# Altium PCB PCB1.PcbDoc
Units mm, origin at the board's own origin, x right, y up, seen from the top; angles counter-clockwise.
Board outline 55 x 52 mm, 6 copper layers (Top Layer, Int1 (GND), Int2 (Sign), Int3 (Sign), Int4 (PWR), Bottom Layer), stack 1.551 mm thick; 24 components, 14 nets, 48 pads, 20 vias.
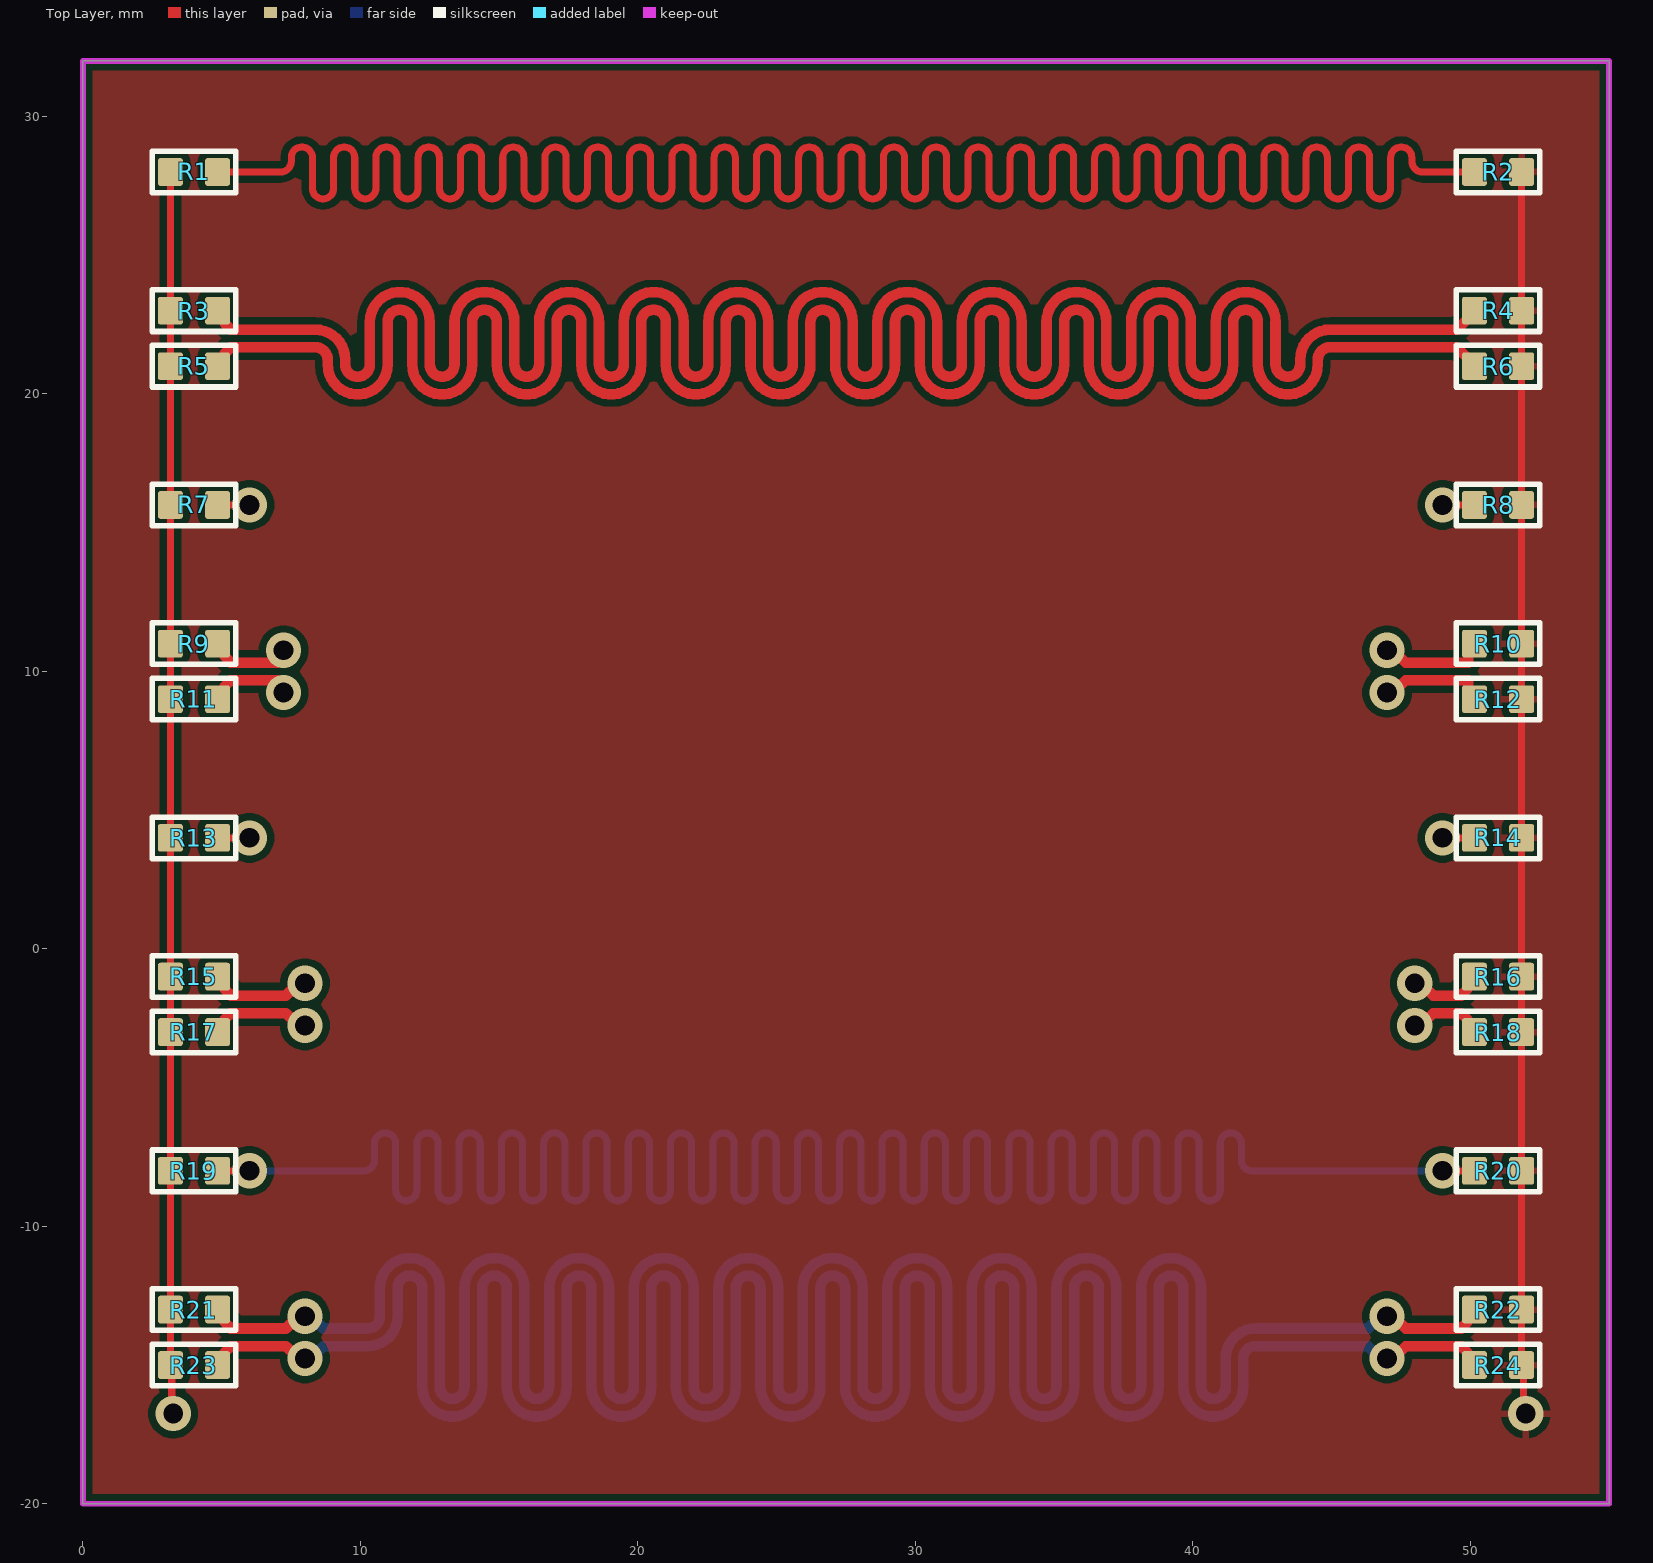
[diagram p0: Top Layer view]
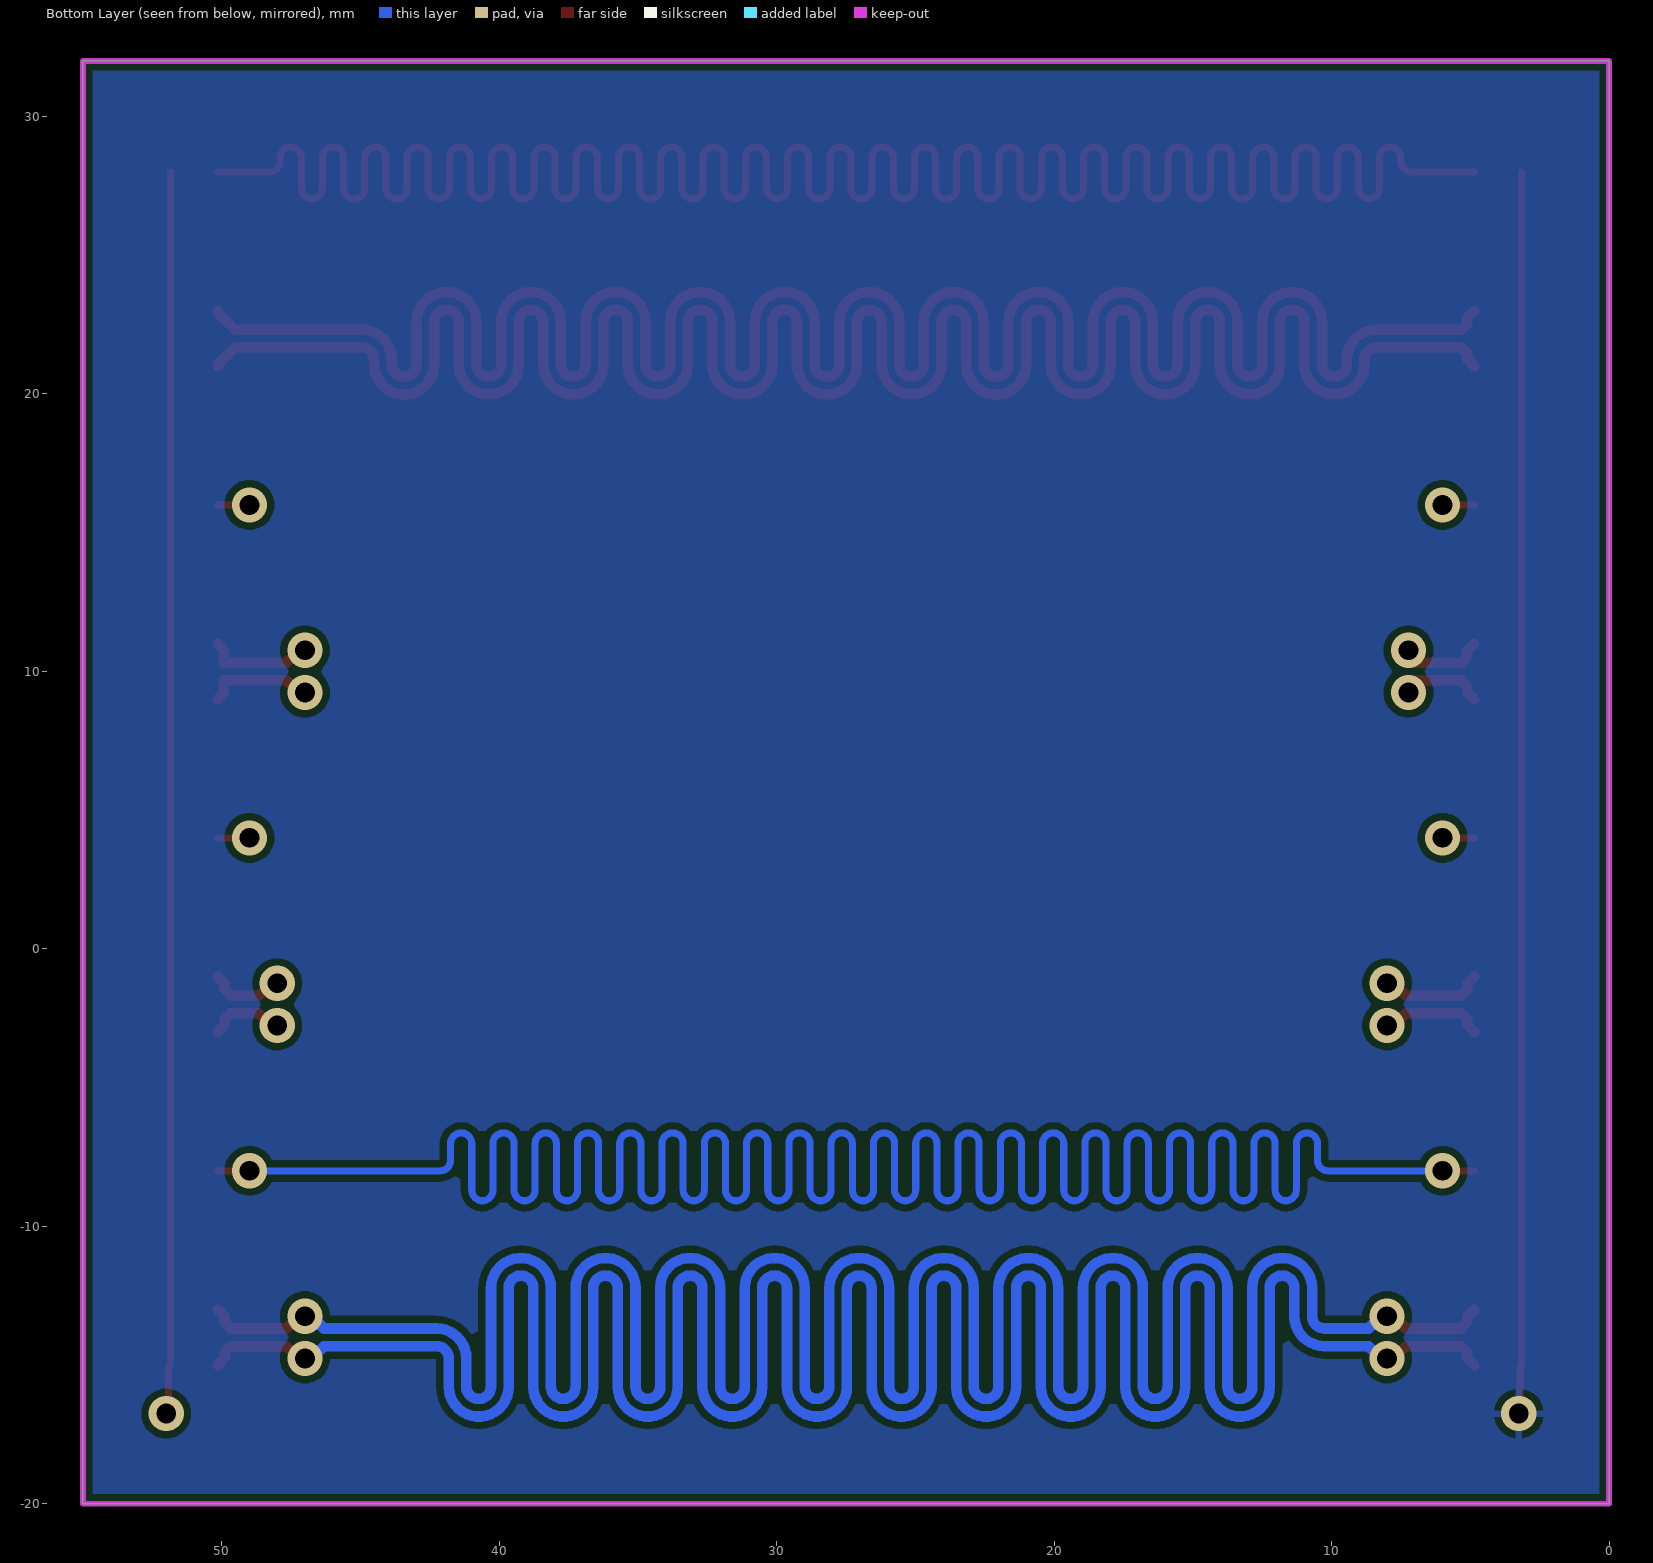
[diagram p1: Bottom Layer view, seen from below]
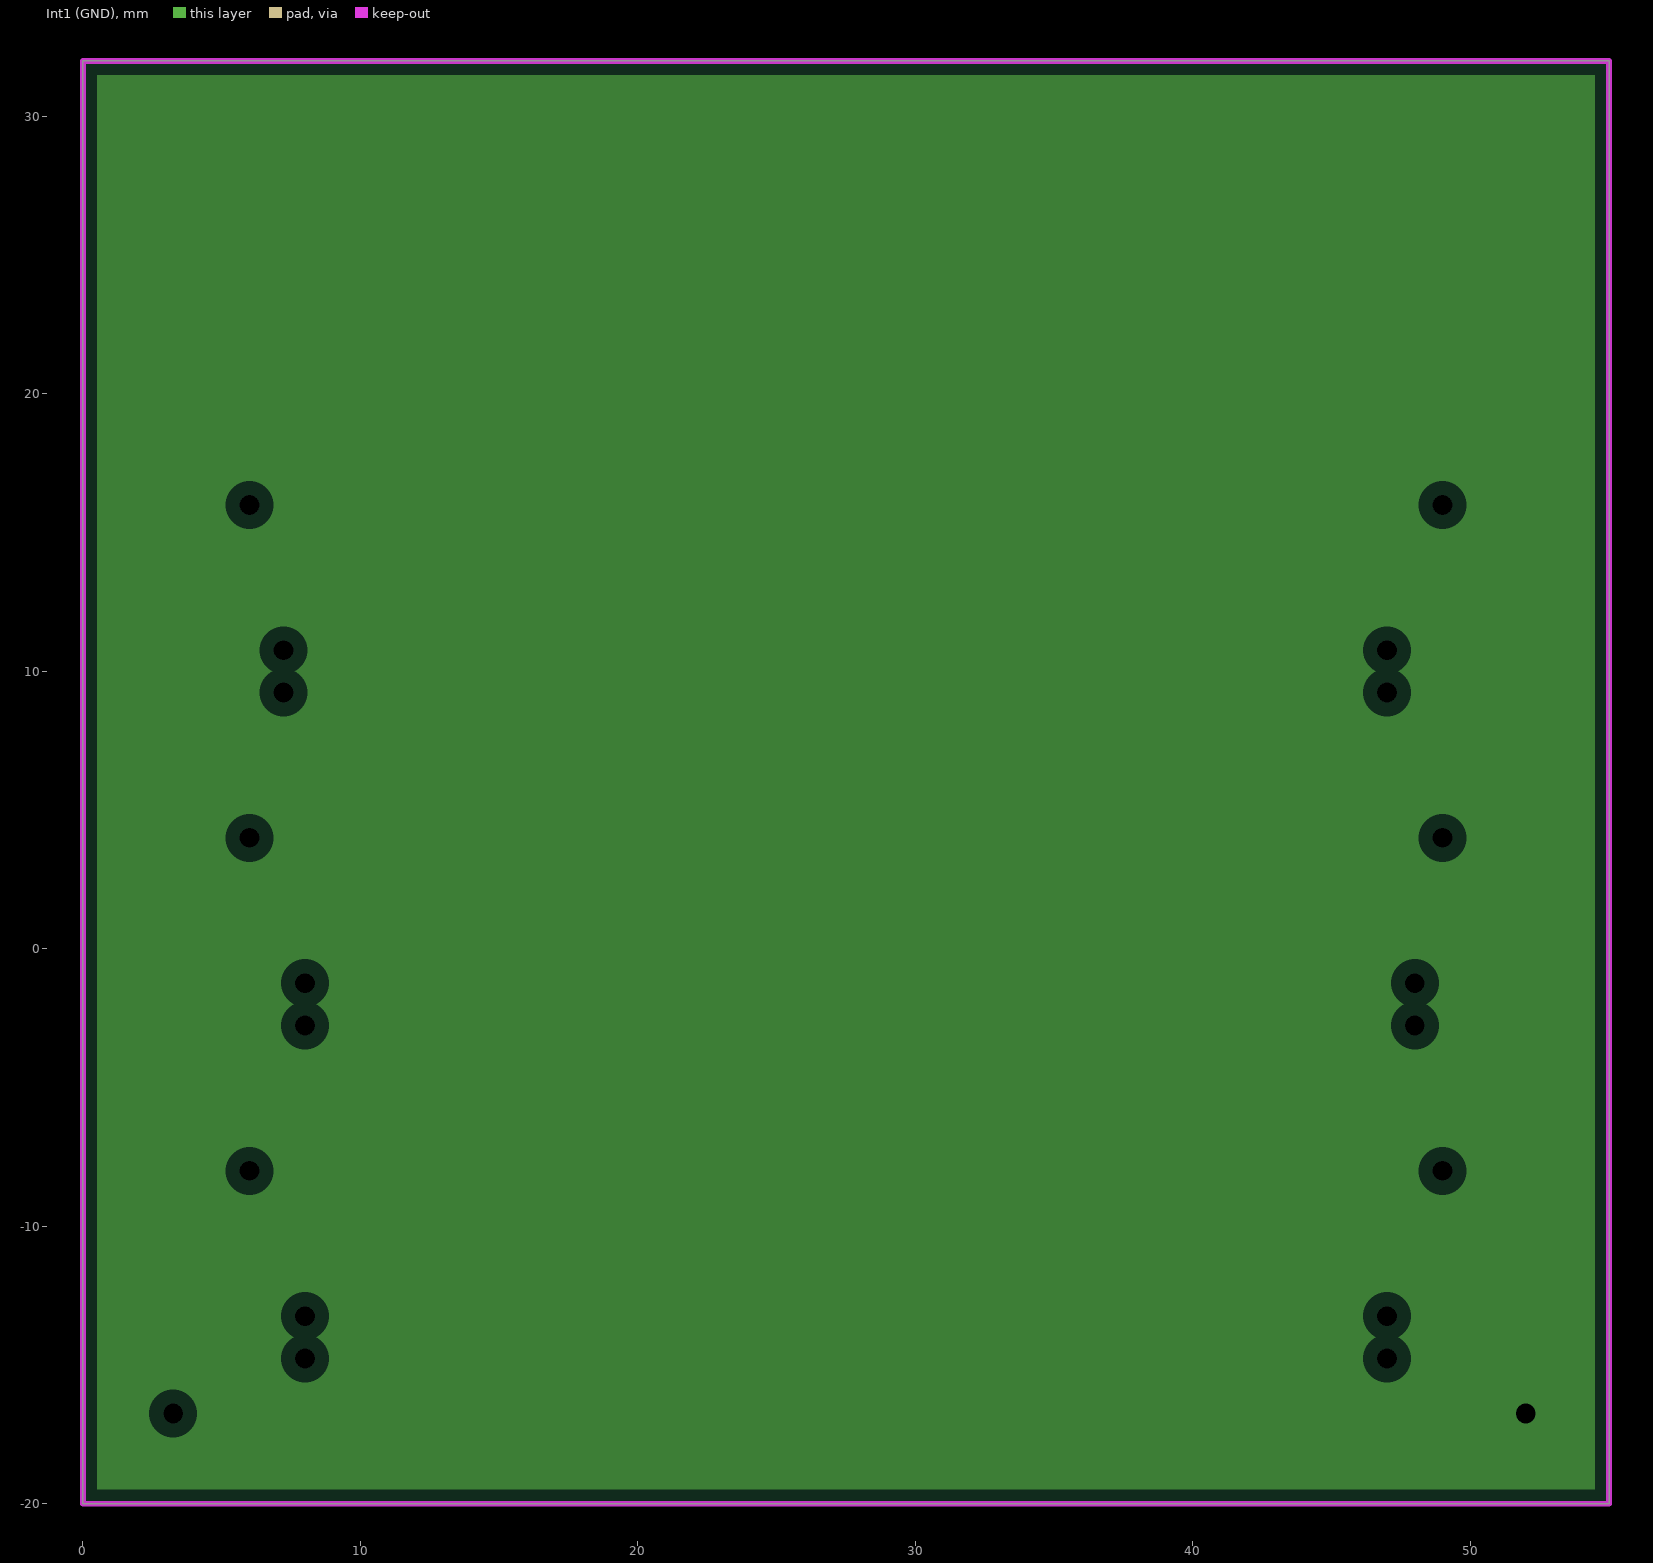
[diagram p2: Int1 (GND), clearances drawn from the general rule]
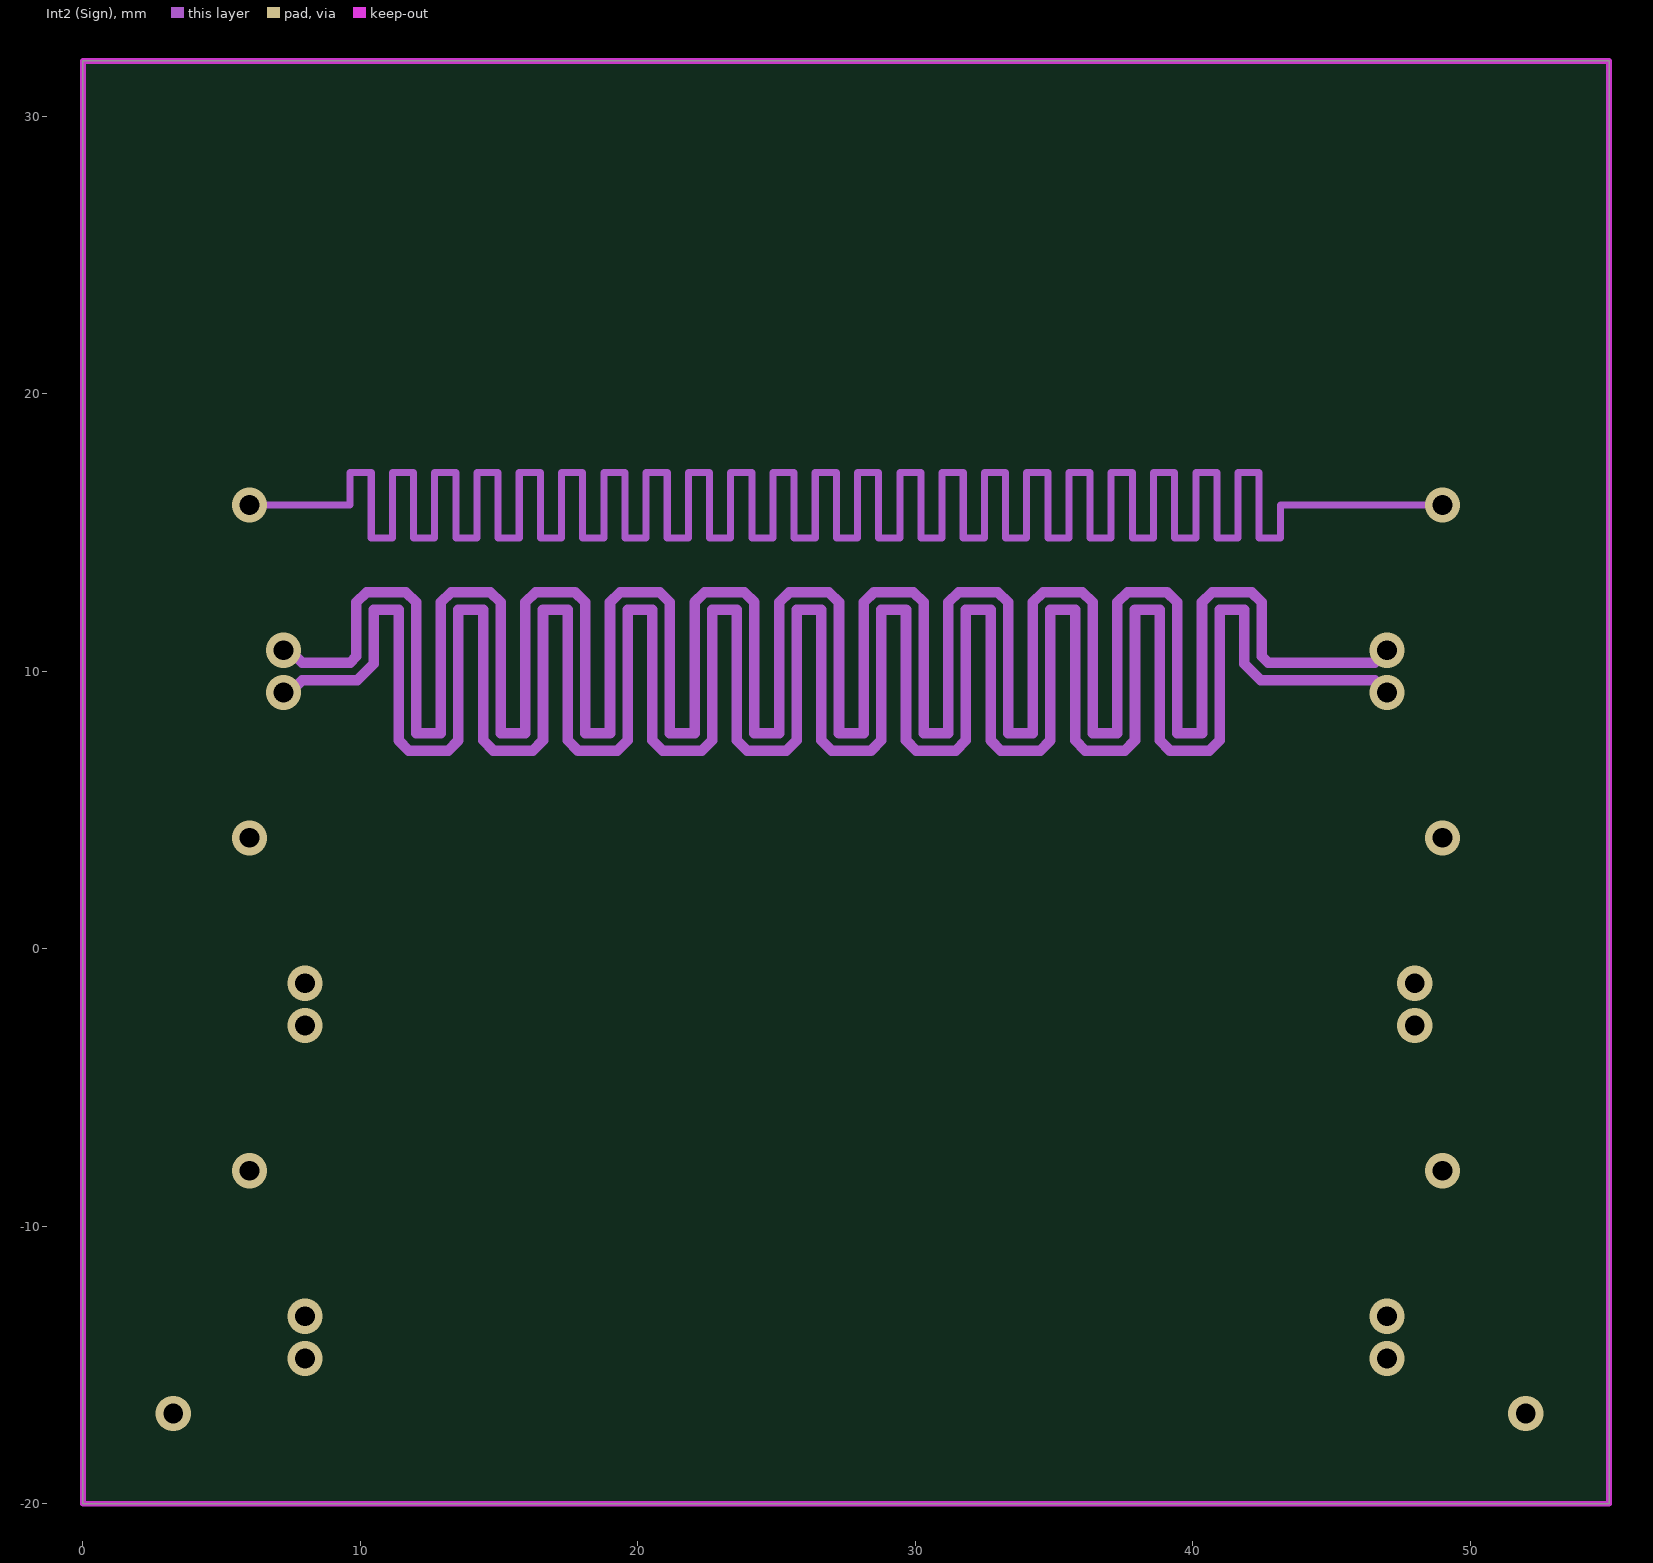
[diagram p3: Int2 (Sign)]
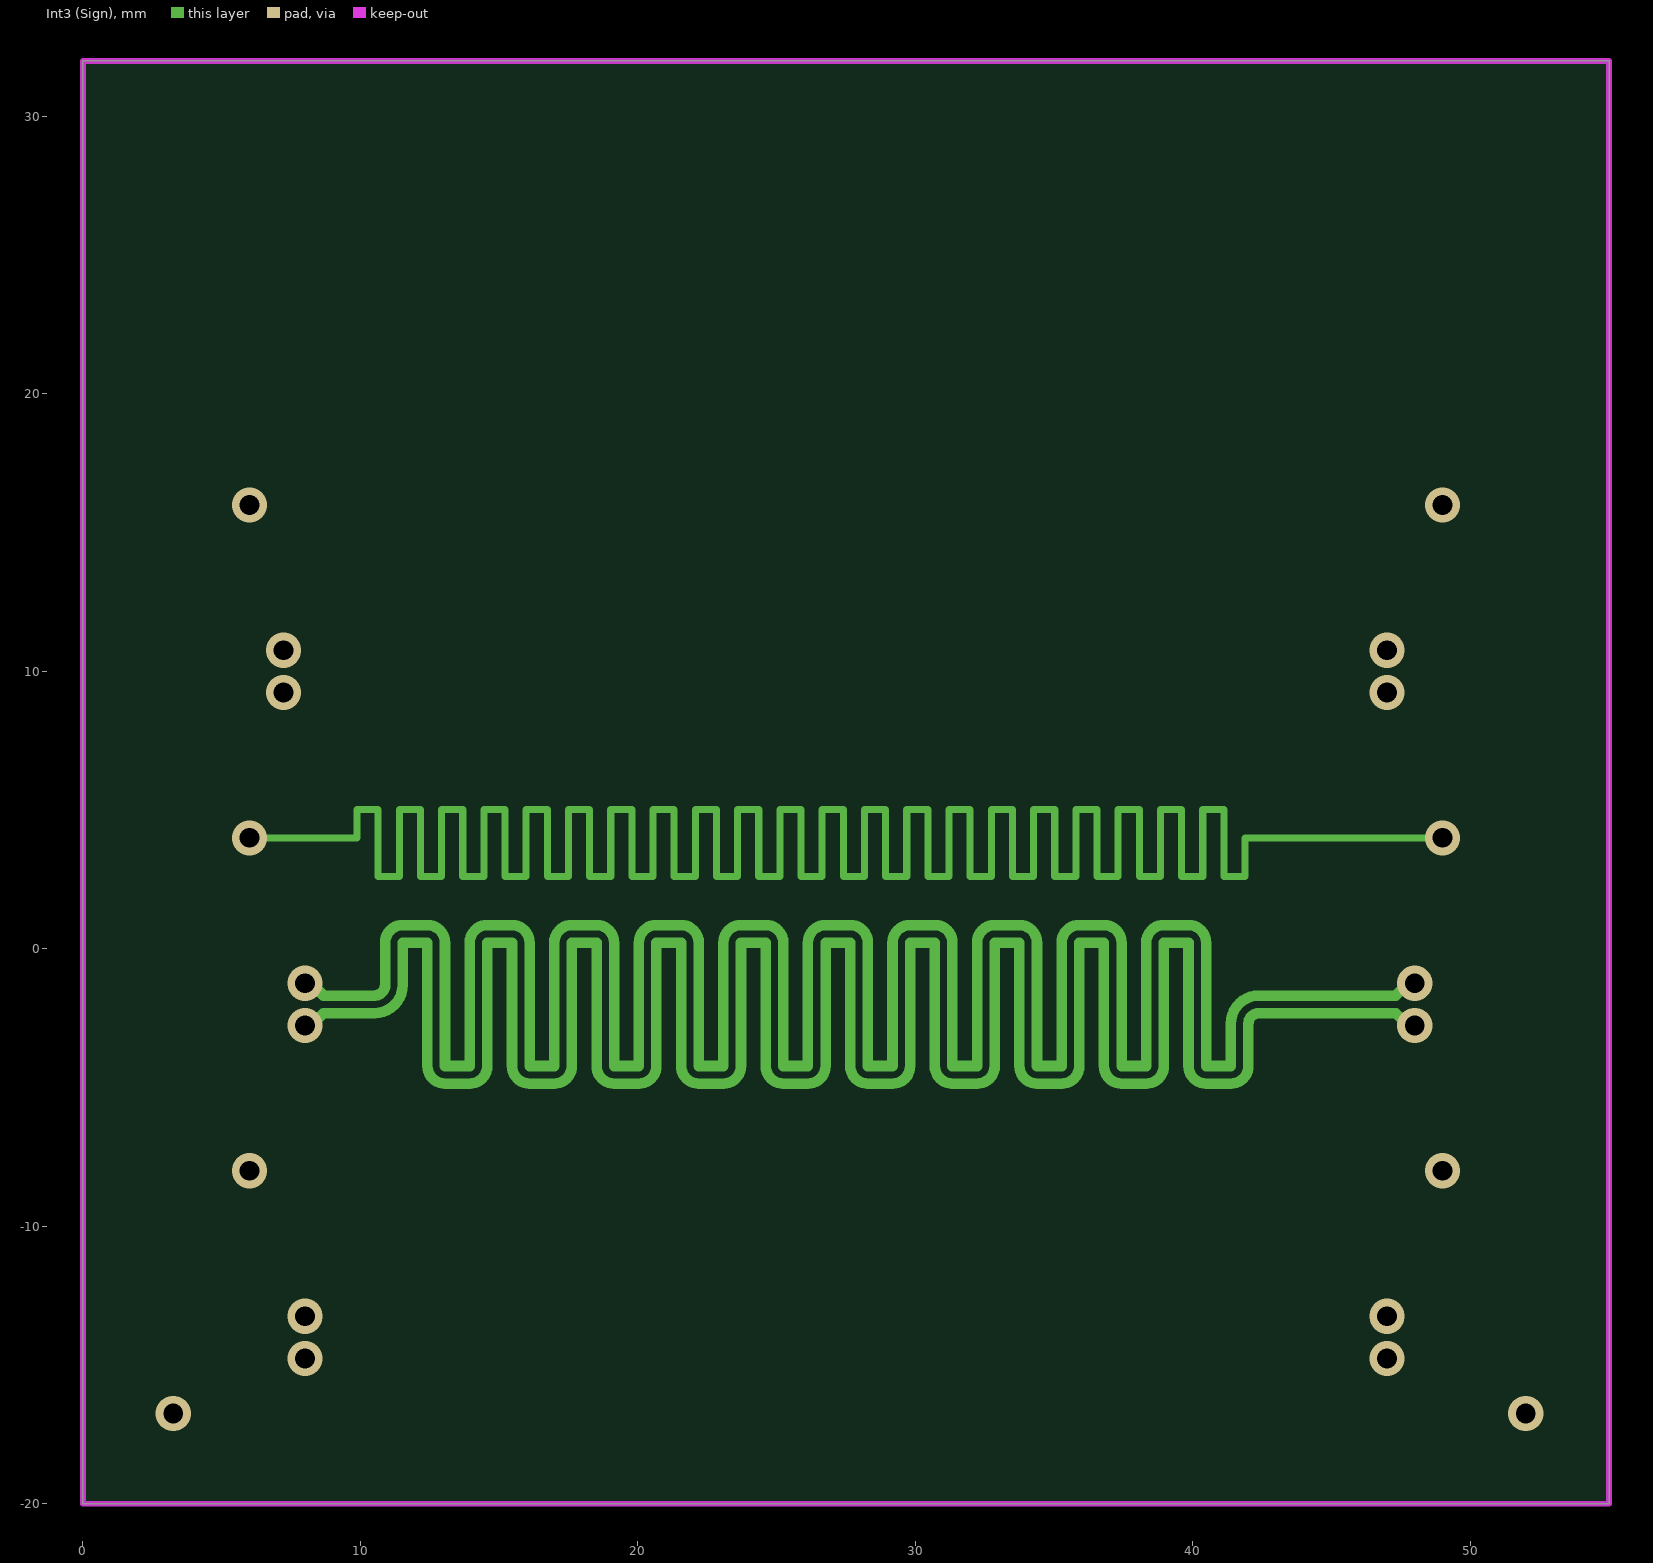
[diagram p4: Int3 (Sign)]
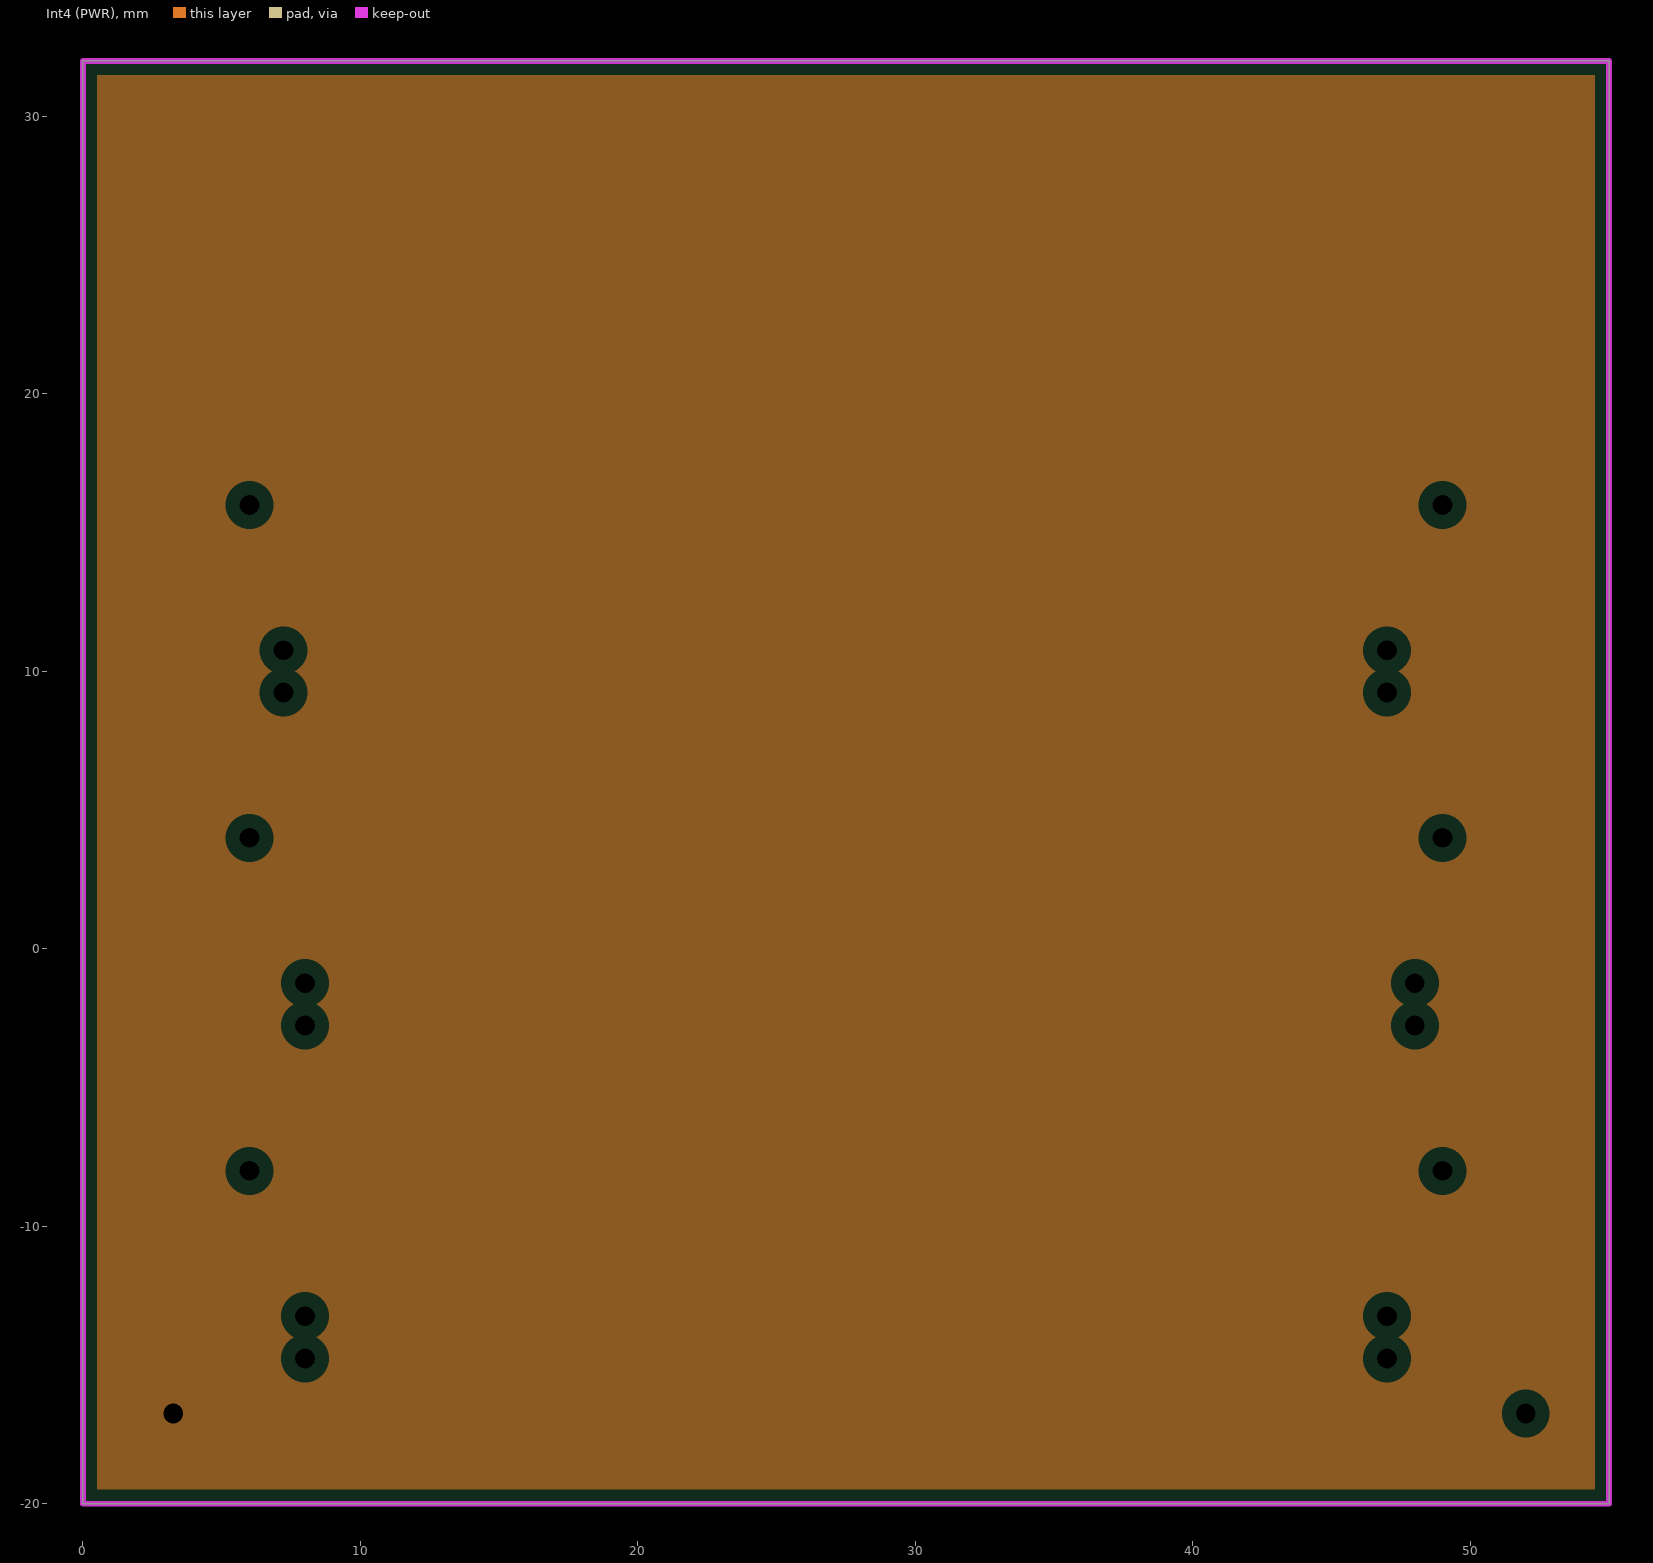
[diagram p5: Int4 (PWR), clearances drawn from the general rule]
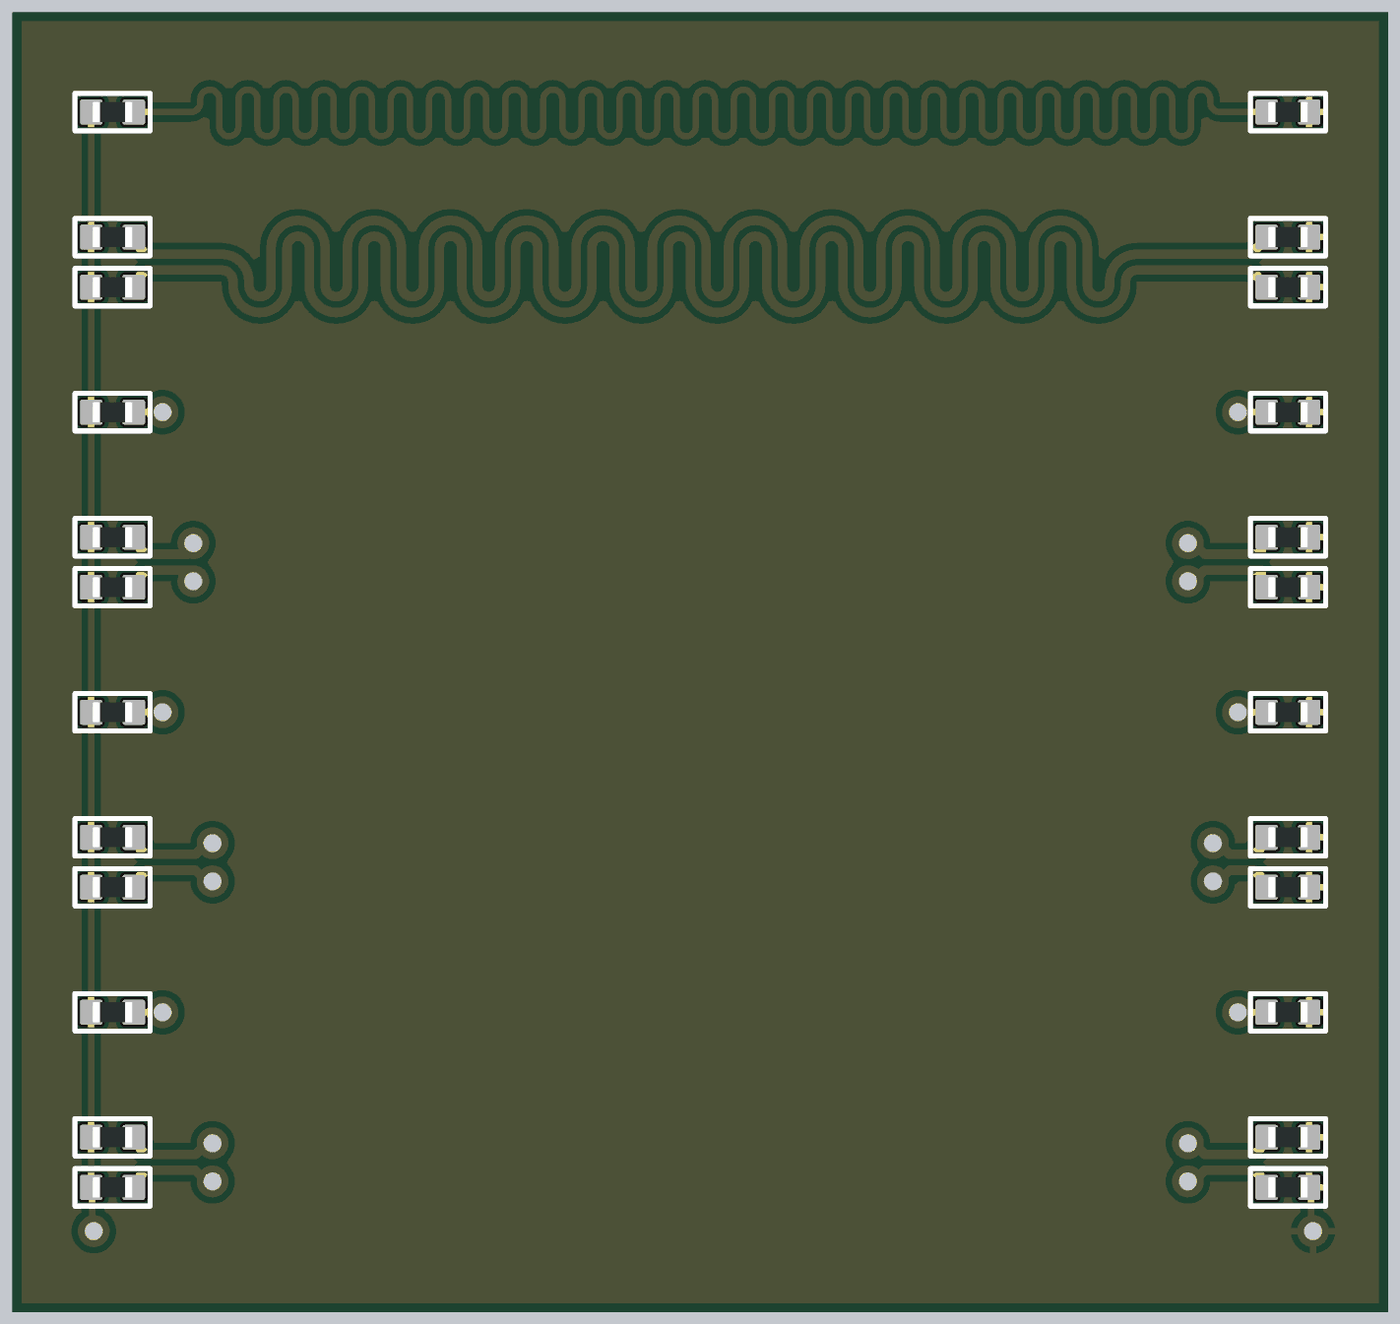
[diagram p6: 3D render of the assembled board from above, using the file's embedded part models]

## Layer stack, top to bottom
Top Solder: solder mask 0.0254, SM-001, Dk 4
Top Layer: signal copper 0.035
Dielectric 1: prepreg 0.0711, PP-006, Dk 4.1
Dielectric 2: prepreg 0.0711, PP-006, Dk 4.1
Int1 (GND): plane copper 0.035, net GND
Dielectric 3: core 0.4572, Core-035, Dk 4.7
Int2 (Sign): signal copper 0.035
Dielectric 4: prepreg 0.0711, PP-006, Dk 4.1
Dielectric 5: prepreg 0.0711, PP-006, Dk 4.1
Int3 (Sign): signal copper 0.035
Dielectric 6: core 0.4572, Core-035, Dk 4.7
Int4 (PWR): plane copper 0.035, net VCC
Dielectric 7: prepreg 0.0711, PP-006, Dk 4.1
Dielectric 8: prepreg 0.0711, PP-006, Dk 4.1
Bottom Layer: signal copper 0.035
Bottom Solder: solder mask 0.0254, SM-001, Dk 4

## Board outline
0,-20 0,32 55,32 55,-20

## Design rules (kind name [scope] priority, off if disabled: settings)
Clearance [All] p1: gap=0.254 ignorepadtopadclearanceinfootprint=FALSE
DiffPairsRouting [All] p1: maxlimit=0.254 minlimit=0.254 mostfreqgap=0.254 toplayer_minwidth=0.381 toplayer_maxwidth=0.381 toplayer_prefwidth=0.381 midlayer1_minwidth=0.381 midlayer1_maxwidth=0.381 midlayer1_prefwidth=0.381 midlayer2_minwidth=0.381 midlayer2_maxwidth=0.381 midlayer2_prefwidth=0.381 bottomlayer_minwidth=0.381 bottomlayer_maxwidth=0.381 bottomlayer_prefwidth=0.381 maxuncoupledlength=12.7
PlaneClearance [All] p1: clearance=0.508
PlaneConnect [All] p1: planeconnectstyle=Relief reliefexpansion=0.508 reliefentries=4 reliefconductorwidth=0.254 reliefairgap=0.254
PolygonConnect [All] p1: connectstyle=Relief reliefconductorwidth=0.254 reliefentries=4 polygonreliefangle="90 Angle" airgapwidth=0.254
RoutingVias [All] p1: holewidth=0.711 width=1.27 viastyle="Through Hole" minholewidth=0.711 minwidth=1.27 maxholewidth=0.711 maxwidth=1.27
SolderMaskExpansion [All] p1: expansion=0.102 istentingtop=FALSE
Width [All] p1: maxlimit=0.254 minlimit=0.254 preferedwidth=0.254
27 further rules are at their usual default settings.

## Classes and differential pairs
differential pair class 90R: Bottom_Layer_Diff Inner_Layer2_Diff Inner_Layer3_Diff Top_Layer_Diff
differential pair Top_Layer_Diff: +Top_Layer_Diff_P -Top_Layer_Diff_N
differential pair Inner_Layer3_Diff: +Inner_Layer3_Diff_P -Inner_Layer3_Diff_N
differential pair Inner_Layer2_Diff: +Inner_Layer2_Diff_P -Inner_Layer2_Diff_N
differential pair Bottom_Layer_Diff: +Bottom_Layer_Diff_P -Bottom_Layer_Diff_N

## Components (designator, comment, footprint, x,y, rotation, side; value= is the part's Value field where it differs from the comment)
R1 "RES-0603" RES-0603 4,28 r0 top value=10K
R2 "RES-0603" RES-0603 51,28 r0 top value=10K
R3 "RES-0603" RES-0603 4,23 r0 top value=10K
R4 "RES-0603" RES-0603 51,23 r0 top value=10K
R5 "RES-0603" RES-0603 4,21 r0 top value=10K
R6 "RES-0603" RES-0603 51,21 r0 top value=10K
R7 "RES-0603" RES-0603 4,16 r0 top value=10K
R8 "RES-0603" RES-0603 51,16 r0 top value=10K
R9 "RES-0603" RES-0603 4,11 r0 top value=10K
R10 "RES-0603" RES-0603 51,11 r0 top value=10K
R11 "RES-0603" RES-0603 4,9 r0 top value=10K
R12 "RES-0603" RES-0603 51,9 r0 top value=10K
R13 "RES-0603" RES-0603 4,4 r0 top value=10K
R14 "RES-0603" RES-0603 51,4 r0 top value=10K
R15 "RES-0603" RES-0603 4,-1 r0 top value=10K
R16 "RES-0603" RES-0603 51,-1 r0 top value=10K
R17 "RES-0603" RES-0603 4,-3 r0 top value=10K
R18 "RES-0603" RES-0603 51,-3 r0 top value=10K
R19 "RES-0603" RES-0603 4,-8 r0 top value=10K
R20 "RES-0603" RES-0603 51,-8 r0 top value=10K
R21 "RES-0603" RES-0603 4,-13 r0 top value=10K
R22 "RES-0603" RES-0603 51,-13 r0 top value=10K
R23 "RES-0603" RES-0603 4,-15 r0 top value=10K
R24 "RES-0603" RES-0603 51,-15 r0 top value=10K

## Footprints (in the part's own frame and the unit in brackets; to place one, negate y for a bottom-side part, rotate by r counter-clockwise, add the part's x,y. Pads: shape width x height; smd on the part's side, far side on the other; paste and mask are expansions set on the pad)
RES-0603 [mm]
  rrect20% 0.9x1 smd: 1(-0.85,0) 2(0.85,0)
  silkscreen extent -1.5,-0.75 1.5,0.75, body extent -0.8,-0.4 0.8,0.4, height 0.45

## Part data
R1 R2 R3 R4 R5 R6 R7 R8 R9 R10 R11 R12 R13 R14 R15 R16 R17 R18 R19 R20 R21 R22 R23 R24: library part Res-XR-0603, "General x Ohm 0603"

## Via types
v1: diameter 1.27, hole 0.711, Top Layer to Bottom Layer, tented both sides, 20 vias

## Nets (pads, with @x,y where several pads share a name; then routed paths per layer and width w, separated by ;. In a path a pad name is that pad's centre, name@x,y a point inside that pad or via, vN(x,y) a via of type N, cw(c..) or ccw(c..) an arc to the next point about the centre after c; other vN are vias at no path point)
Bottom_Layer_Diff_N: R23.2 R24.1 | length 134.7
  Top Layer w0.381: R23.2 5.11,-14.74 5.11,-14.541 5.333,-14.317 5.956,-14.317 7.315,-14.317 7.759,-14.762 v1(8,-14.762) ; v1(47,-14.762) 47.223,-14.762 47.668,-14.317 48.853,-14.317 49.667,-14.317 49.891,-14.541 49.891,-14.74 R24.1
  Bottom Layer w0.381: v1(8,-14.762) 8.223,-14.762 8.668,-14.317 9.75,-14.317 10.258,-14.317 ccw(c10.258,-13.238) 11.338,-13.238 11.338,-12.222 cw(c11.782,-12.222) 12.227,-12.222 12.227,-15.778 ccw(c13.306,-15.778) 14.386,-15.778 14.386,-12.222 cw(c14.83,-12.222) 15.275,-12.222 15.275,-15.778 ccw(c16.354,-15.778) 17.434,-15.778 17.434,-12.222 cw(c17.878,-12.222) 18.323,-12.222 18.323,-15.778 ccw(c19.402,-15.778) 20.482,-15.778 20.482,-12.222 cw(c20.926,-12.222) 21.371,-12.222 21.371,-15.778 ccw(c22.45,-15.778) 23.53,-15.778 23.53,-12.222 cw(c23.974,-12.222) 24.419,-12.222 24.419,-15.778 ccw(c25.498,-15.778) 26.578,-15.778 26.578,-12.222 cw(c27.022,-12.222) 27.467,-12.222 27.467,-15.778 ccw(c28.546,-15.778) 29.626,-15.778 29.626,-12.222 cw(c30.07,-12.222) 30.515,-12.222 30.515,-15.778 ccw(c31.594,-15.778) 32.674,-15.778 32.674,-12.222 cw(c33.118,-12.222) 33.563,-12.222 33.563,-15.778 ccw(c34.642,-15.778) 35.722,-15.778 35.722,-12.222 cw(c36.166,-12.222) 36.611,-12.222 36.611,-15.778 ccw(c37.69,-15.778) 38.77,-15.778 38.77,-12.222 cw(c39.214,-12.222) 39.659,-12.222 39.659,-15.778 ccw(c40.738,-15.778) 41.818,-15.778 41.818,-14.762 cw(c42.262,-14.762) 42.262,-14.317 45,-14.317 46.315,-14.317 46.759,-14.762 v1(47,-14.762)
Bottom_Layer_Diff_P: R21.2 R22.1 | length 134.7
  Top Layer w0.381: R21.2 5.11,-13.26 5.11,-13.459 5.333,-13.682 5.693,-13.682 7.315,-13.682 7.759,-13.238 v1(8,-13.238) ; v1(47,-13.238) 47.223,-13.238 47.668,-13.682 49.116,-13.682 49.667,-13.682 49.891,-13.459 49.891,-13.26 R22.1
  Bottom Layer w0.381: v1(8,-13.238) 8.223,-13.238 8.668,-13.682 9.75,-13.682 10.258,-13.682 ccw(c10.258,-13.238) 10.703,-13.238 10.703,-12.222 cw(c11.782,-12.222) 12.862,-12.222 12.862,-15.778 ccw(c13.306,-15.778) 13.751,-15.778 13.751,-12.222 cw(c14.83,-12.222) 15.91,-12.222 15.91,-15.778 ccw(c16.354,-15.778) 16.799,-15.778 16.799,-12.222 cw(c17.878,-12.222) 18.958,-12.222 18.958,-15.778 ccw(c19.402,-15.778) 19.847,-15.778 19.847,-12.222 cw(c20.926,-12.222) 22.006,-12.222 22.006,-15.778 ccw(c22.45,-15.778) 22.895,-15.778 22.895,-12.222 cw(c23.974,-12.222) 25.054,-12.222 25.054,-15.778 ccw(c25.498,-15.778) 25.943,-15.778 25.943,-12.222 cw(c27.022,-12.222) 28.102,-12.222 28.102,-15.778 ccw(c28.546,-15.778) 28.991,-15.778 28.991,-12.222 cw(c30.07,-12.222) 31.15,-12.222 31.15,-15.778 ccw(c31.594,-15.778) 32.039,-15.778 32.039,-12.222 cw(c33.118,-12.222) 34.198,-12.222 34.198,-15.778 ccw(c34.642,-15.778) 35.087,-15.778 35.087,-12.222 cw(c36.166,-12.222) 37.246,-12.222 37.246,-15.778 ccw(c37.69,-15.778) 38.135,-15.778 38.135,-12.222 cw(c39.214,-12.222) 40.294,-12.222 40.294,-15.778 ccw(c40.738,-15.778) 41.183,-15.778 41.183,-14.762 cw(c42.262,-14.762) 42.262,-13.682 45,-13.682 46.315,-13.682 46.759,-13.238 v1(47,-13.238)
Bottom_Layer_Single: R19.2 R20.1 | length 132.1
  Top Layer w0.254: R19.2 v1(6,-8) ; v1(49,-8) R20.1
  Bottom Layer w0.254: v1(6,-8) 10,-8 10.127,-8 ccw(c10.127,-7.619) 10.508,-7.619 10.508,-7.015 cw(c10.889,-7.015) 11.27,-7.015 11.27,-8.698 ccw(c11.651,-8.698) 12.032,-8.698 12.032,-7.015 cw(c12.413,-7.015) 12.794,-7.015 12.794,-8.698 ccw(c13.175,-8.698) 13.556,-8.698 13.556,-7.015 cw(c13.937,-7.015) 14.318,-7.015 14.318,-8.698 ccw(c14.699,-8.698) 15.08,-8.698 15.08,-7.015 cw(c15.461,-7.015) 15.842,-7.015 15.842,-8.698 ccw(c16.223,-8.698) 16.604,-8.698 16.604,-7.015 cw(c16.985,-7.015) 17.366,-7.015 17.366,-8.698 ccw(c17.747,-8.698) 18.128,-8.698 18.128,-7.015 cw(c18.509,-7.015) 18.89,-7.015 18.89,-8.698 ccw(c19.271,-8.698) 19.652,-8.698 19.652,-7.015 cw(c20.033,-7.015) 20.414,-7.015 20.414,-8.698 ccw(c20.795,-8.698) 21.176,-8.698 21.176,-7.015 cw(c21.557,-7.015) 21.938,-7.015 21.938,-8.698 ccw(c22.319,-8.698) 22.7,-8.698 22.7,-7.015 cw(c23.081,-7.015) 23.462,-7.015 23.462,-8.698 ccw(c23.843,-8.698) 24.224,-8.698 24.224,-7.015 cw(c24.605,-7.015) 24.986,-7.015 24.986,-8.698 ccw(c25.367,-8.698) 25.748,-8.698 25.748,-7.015 cw(c26.129,-7.015) 26.51,-7.015 26.51,-8.698 ccw(c26.891,-8.698) 27.272,-8.698 27.272,-7.015 cw(c27.653,-7.015) 28.034,-7.015 28.034,-8.698 ccw(c28.415,-8.698) 28.796,-8.698 28.796,-7.015 cw(c29.177,-7.015) 29.558,-7.015 29.558,-8.698 ccw(c29.939,-8.698) 30.32,-8.698 30.32,-7.015 cw(c30.701,-7.015) 31.082,-7.015 31.082,-8.698 ccw(c31.463,-8.698) 31.844,-8.698 31.844,-7.015 cw(c32.225,-7.015) 32.606,-7.015 32.606,-8.698 ccw(c32.987,-8.698) 33.368,-8.698 33.368,-7.015 cw(c33.749,-7.015) 34.13,-7.015 34.13,-8.698 ccw(c34.511,-8.698) 34.892,-8.698 34.892,-7.015 cw(c35.273,-7.015) 35.654,-7.015 35.654,-8.698 ccw(c36.035,-8.698) 36.416,-8.698 36.416,-7.015 cw(c36.797,-7.015) 37.178,-7.015 37.178,-8.698 ccw(c37.559,-8.698) 37.94,-8.698 37.94,-7.015 cw(c38.321,-7.015) 38.702,-7.015 38.702,-8.698 ccw(c39.083,-8.698) 39.464,-8.698 39.464,-7.015 cw(c39.845,-7.015) 40.226,-7.015 40.226,-8.698 ccw(c40.607,-8.698) 40.988,-8.698 40.988,-7.015 cw(c41.369,-7.015) 41.75,-7.015 41.75,-7.619 ccw(c42.131,-7.619) 42.131,-8 43.25,-8 v1(49,-8)
GND: R2.2 R4.2 R6.2 R8.2 R10.2 R12.2 R14.2 R16.2 R18.2 R20.2 R22.2 R24.2 | length 44.8
  Top Layer w0.254: R2.2 R4.2 R6.2 R8.2 R10.2 R12.2 R14.2 R16.2 R18.2 R20.2 R22.2 R24.2 51.925,-15.075 51.925,-16.675 v1(52,-16.75)
Inner_Layer2_Diff_N: R11.2 R12.1 | length 148.7
  Top Layer w0.381: R11.2 5.11,9.26 5.11,9.459 5.333,9.683 7,9.683 7.229,9.453 v1(7.229,9.238) ; v1(47,9.238) 47.223,9.238 47.668,9.683 49.927,9.683 49.927,9.223 R12.1
  Int2 (Sign) w0.381: v1(7.229,9.238) 7.452,9.238 7.897,9.683 9.25,9.683 9.89,9.683 10.485,10.278 10.485,12.223 11.374,12.223 11.374,7.514 11.746,7.143 13.161,7.143 13.533,7.514 13.533,12.223 14.422,12.223 14.422,7.514 14.794,7.143 16.209,7.143 16.581,7.514 16.581,12.223 17.47,12.223 17.47,7.514 17.842,7.143 19.257,7.143 19.629,7.514 19.629,12.223 20.518,12.223 20.518,7.514 20.89,7.143 22.305,7.143 22.677,7.514 22.677,12.223 23.566,12.223 23.566,7.514 23.938,7.143 25.353,7.143 25.725,7.514 25.725,12.223 26.614,12.223 26.614,7.514 26.986,7.143 28.401,7.143 28.773,7.514 28.773,12.223 29.662,12.223 29.662,7.514 30.034,7.143 31.449,7.143 31.821,7.514 31.821,12.223 32.71,12.223 32.71,7.514 33.082,7.143 34.497,7.143 34.869,7.514 34.869,12.223 35.758,12.223 35.758,7.514 36.13,7.143 37.545,7.143 37.917,7.514 37.917,12.223 38.806,12.223 38.806,7.514 39.178,7.143 40.593,7.143 40.965,7.514 40.965,12.223 41.854,12.223 41.854,10.278 42.449,9.683 44.5,9.683 46.556,9.683 v1(47,9.238)
Inner_Layer2_Diff_P: R9.2 R10.1 | length 148.7
  Top Layer w0.381: R9.2 5.11,10.74 5.11,10.541 5.333,10.318 7,10.318 7.229,10.547 v1(7.229,10.762) ; v1(47,10.762) 47.223,10.762 47.668,10.318 49.927,10.318 49.927,10.777 R10.1
  Int2 (Sign) w0.381: v1(7.229,10.762) 7.452,10.762 7.897,10.318 9.25,10.318 9.627,10.318 9.85,10.541 9.85,12.486 10.222,12.858 11.637,12.858 12.009,12.486 12.009,7.778 12.898,7.778 12.898,12.486 13.27,12.858 14.685,12.858 15.057,12.486 15.057,7.778 15.946,7.778 15.946,12.486 16.318,12.858 17.733,12.858 18.105,12.486 18.105,7.778 18.994,7.778 18.994,12.486 19.366,12.858 20.781,12.858 21.153,12.486 21.153,7.778 22.042,7.778 22.042,12.486 22.414,12.858 23.829,12.858 24.201,12.486 24.201,7.778 25.09,7.778 25.09,12.486 25.462,12.858 26.877,12.858 27.249,12.486 27.249,7.778 28.138,7.778 28.138,12.486 28.51,12.858 29.925,12.858 30.297,12.486 30.297,7.778 31.186,7.778 31.186,12.486 31.558,12.858 32.973,12.858 33.345,12.486 33.345,7.778 34.234,7.778 34.234,12.486 34.606,12.858 36.021,12.858 36.393,12.486 36.393,7.778 37.282,7.778 37.282,12.486 37.654,12.858 39.069,12.858 39.441,12.486 39.441,7.778 40.33,7.778 40.33,12.486 40.702,12.858 42.117,12.858 42.489,12.486 42.489,10.541 42.712,10.318 44.5,10.318 46.556,10.318 v1(47,10.762)
Inner_Layer2_Single: R7.2 R8.1 | length 149.7
  Top Layer w0.254: R7.2 v1(6,16) ; v1(49,16) R8.1
  Int2 (Sign) w0.254: v1(6,16) 9.5,16 9.627,16 9.627,17.172 10.389,17.172 10.389,14.8 11.151,14.8 11.151,17.172 11.913,17.172 11.913,14.8 12.675,14.8 12.675,17.172 13.437,17.172 13.437,14.8 14.199,14.8 14.199,17.172 14.961,17.172 14.961,14.8 15.723,14.8 15.723,17.172 16.485,17.172 16.485,14.8 17.247,14.8 17.247,17.172 18.009,17.172 18.009,14.8 18.771,14.8 18.771,17.172 19.533,17.172 19.533,14.8 20.295,14.8 20.295,17.172 21.057,17.172 21.057,14.8 21.819,14.8 21.819,17.172 22.581,17.172 22.581,14.8 23.343,14.8 23.343,17.172 24.105,17.172 24.105,14.8 24.867,14.8 24.867,17.172 25.629,17.172 25.629,14.8 26.391,14.8 26.391,17.172 27.153,17.172 27.153,14.8 27.915,14.8 27.915,17.172 28.677,17.172 28.677,14.8 29.439,14.8 29.439,17.172 30.201,17.172 30.201,14.8 30.963,14.8 30.963,17.172 31.725,17.172 31.725,14.8 32.487,14.8 32.487,17.172 33.249,17.172 33.249,14.8 34.011,14.8 34.011,17.172 34.773,17.172 34.773,14.8 35.535,14.8 35.535,17.172 36.297,17.172 36.297,14.8 37.059,14.8 37.059,17.172 37.821,17.172 37.821,14.8 38.583,14.8 38.583,17.172 39.345,17.172 39.345,14.8 40.107,14.8 40.107,17.172 40.869,17.172 40.869,14.8 41.631,14.8 41.631,17.172 42.393,17.172 42.393,14.8 43.155,14.8 43.155,16 43.75,16 v1(49,16)
Inner_Layer3_Diff_N: R17.2 R18.1 | length 142.4
  Top Layer w0.381: R17.2 5.11,-2.74 5.11,-2.541 5.333,-2.318 5.956,-2.318 7.315,-2.317 7.759,-2.762 v1(8,-2.762) ; v1(48,-2.762) 48.223,-2.762 48.668,-2.317 49.044,-2.317 49.667,-2.318 49.891,-2.541 49.891,-2.74 R18.1
  Int3 (Sign) w0.381: v1(8,-2.762) 8.223,-2.762 8.668,-2.317 10,-2.317 10.508,-2.317 ccw(c10.508,-1.301) 11.524,-1.301 11.524,0.223 12.413,0.223 12.413,-4.222 ccw(c13.048,-4.222) 13.048,-4.857 13.937,-4.857 ccw(c13.937,-4.222) 14.572,-4.222 14.572,0.223 15.461,0.223 15.461,-4.222 ccw(c16.096,-4.222) 16.096,-4.857 16.985,-4.857 ccw(c16.985,-4.222) 17.62,-4.222 17.62,0.223 18.509,0.223 18.509,-4.222 ccw(c19.144,-4.222) 19.144,-4.857 20.033,-4.857 ccw(c20.033,-4.222) 20.668,-4.222 20.668,0.223 21.557,0.223 21.557,-4.222 ccw(c22.192,-4.222) 22.192,-4.857 23.081,-4.857 ccw(c23.081,-4.222) 23.716,-4.222 23.716,0.223 24.605,0.223 24.605,-4.222 ccw(c25.24,-4.222) 25.24,-4.857 26.129,-4.857 ccw(c26.129,-4.222) 26.764,-4.222 26.764,0.223 27.653,0.223 27.653,-4.222 ccw(c28.288,-4.222) 28.288,-4.857 29.177,-4.857 ccw(c29.177,-4.222) 29.812,-4.222 29.812,0.223 30.701,0.223 30.701,-4.222 ccw(c31.336,-4.222) 31.336,-4.857 32.225,-4.857 ccw(c32.225,-4.222) 32.86,-4.222 32.86,0.223 33.749,0.223 33.749,-4.222 ccw(c34.384,-4.222) 34.384,-4.857 35.273,-4.857 ccw(c35.273,-4.222) 35.908,-4.222 35.908,0.223 36.797,0.223 36.797,-4.222 ccw(c37.432,-4.222) 37.432,-4.857 38.321,-4.857 ccw(c38.321,-4.222) 38.956,-4.222 38.956,0.223 39.845,0.223 39.845,-4.222 ccw(c40.48,-4.222) 40.48,-4.857 41.369,-4.857 ccw(c41.369,-4.222) 42.004,-4.222 42.004,-2.698 cw(c42.385,-2.698) 42.385,-2.317 44.75,-2.317 47.315,-2.317 47.759,-2.762 v1(48,-2.762)
Inner_Layer3_Diff_P: R15.2 R16.1 | length 142.4
  Top Layer w0.381: R15.2 5.11,-1.26 5.11,-1.459 5.333,-1.683 5.693,-1.683 7.315,-1.682 7.759,-1.238 v1(8,-1.238) ; v1(48,-1.238) 48.223,-1.238 48.668,-1.682 49.307,-1.682 49.667,-1.683 49.891,-1.459 49.891,-1.26 R16.1
  Int3 (Sign) w0.381: v1(8,-1.238) 8.223,-1.238 8.668,-1.682 10,-1.682 10.508,-1.682 ccw(c10.508,-1.301) 10.889,-1.301 10.889,0.223 cw(c11.524,0.223) 11.524,0.858 12.413,0.858 cw(c12.413,0.223) 13.048,0.223 13.048,-4.222 13.937,-4.222 13.937,0.223 cw(c14.572,0.223) 14.572,0.858 15.461,0.858 cw(c15.461,0.223) 16.096,0.223 16.096,-4.222 16.985,-4.222 16.985,0.223 cw(c17.62,0.223) 17.62,0.858 18.509,0.858 cw(c18.509,0.223) 19.144,0.223 19.144,-4.222 20.033,-4.222 20.033,0.223 cw(c20.668,0.223) 20.668,0.858 21.557,0.858 cw(c21.557,0.223) 22.192,0.223 22.192,-4.222 23.081,-4.222 23.081,0.223 cw(c23.716,0.223) 23.716,0.858 24.605,0.858 cw(c24.605,0.223) 25.24,0.223 25.24,-4.222 26.129,-4.222 26.129,0.223 cw(c26.764,0.223) 26.764,0.858 27.653,0.858 cw(c27.653,0.223) 28.288,0.223 28.288,-4.222 29.177,-4.222 29.177,0.223 cw(c29.812,0.223) 29.812,0.858 30.701,0.858 cw(c30.701,0.223) 31.336,0.223 31.336,-4.222 32.225,-4.222 32.225,0.223 cw(c32.86,0.223) 32.86,0.858 33.749,0.858 cw(c33.749,0.223) 34.384,0.223 34.384,-4.222 35.273,-4.222 35.273,0.223 cw(c35.908,0.223) 35.908,0.858 36.797,0.858 cw(c36.797,0.223) 37.432,0.223 37.432,-4.222 38.321,-4.222 38.321,0.223 cw(c38.956,0.223) 38.956,0.858 39.845,0.858 cw(c39.845,0.223) 40.48,0.223 40.48,-4.222 41.369,-4.222 41.369,-2.698 cw(c42.385,-2.698) 42.385,-1.682 44.75,-1.682 47.315,-1.682 47.759,-1.238 v1(48,-1.238)
Inner_Layer3_Single: R13.2 R14.1 | length 147
  Top Layer w0.254: R13.2 v1(6,4) ; v1(49,4) R14.1
  Int3 (Sign) w0.254: v1(6,4) 9.75,4 9.877,4 9.877,5.029 10.639,5.029 10.639,2.607 11.401,2.607 11.401,5.029 12.163,5.029 12.163,2.607 12.925,2.607 12.925,5.029 13.687,5.029 13.687,2.607 14.449,2.607 14.449,5.029 15.211,5.029 15.211,2.607 15.973,2.607 15.973,5.029 16.735,5.029 16.735,2.607 17.497,2.607 17.497,5.029 18.259,5.029 18.259,2.607 19.021,2.607 19.021,5.029 19.783,5.029 19.783,2.607 20.545,2.607 20.545,5.029 21.307,5.029 21.307,2.607 22.069,2.607 22.069,5.029 22.831,5.029 22.831,2.607 23.593,2.607 23.593,5.029 24.355,5.029 24.355,2.607 25.117,2.607 25.117,5.029 25.879,5.029 25.879,2.607 26.641,2.607 26.641,5.029 27.403,5.029 27.403,2.607 28.165,2.607 28.165,5.029 28.927,5.029 28.927,2.607 29.689,2.607 29.689,5.029 30.451,5.029 30.451,2.607 31.213,2.607 31.213,5.029 31.975,5.029 31.975,2.607 32.737,2.607 32.737,5.029 33.499,5.029 33.499,2.607 34.261,2.607 34.261,5.029 35.023,5.029 35.023,2.607 35.785,2.607 35.785,5.029 36.547,5.029 36.547,2.607 37.309,2.607 37.309,5.029 38.071,5.029 38.071,2.607 38.833,2.607 38.833,5.029 39.595,5.029 39.595,2.607 40.357,2.607 40.357,5.029 41.119,5.029 41.119,2.607 41.881,2.607 41.881,4 42.75,4 v1(49,4)
Top_Layer_Diff_N: R5.2 R6.1 | length 100.9
  Top Layer w0.381: R5.2 5.11,21.26 5.11,21.459 5.333,21.682 6.341,21.682 8.373,21.682 cw(c8.373,21.238) 8.818,21.238 8.818,21.063 ccw(c9.897,21.063) 10.977,21.063 10.977,22.593 cw(c11.421,22.593) 11.866,22.593 11.866,21.063 ccw(c12.945,21.063) 14.025,21.063 14.025,22.593 cw(c14.469,22.593) 14.914,22.593 14.914,21.063 ccw(c15.993,21.063) 17.073,21.063 17.073,22.593 cw(c17.517,22.593) 17.962,22.593 17.962,21.063 ccw(c19.041,21.063) 20.121,21.063 20.121,22.593 cw(c20.565,22.593) 21.01,22.593 21.01,21.063 ccw(c22.089,21.063) 23.169,21.063 23.169,22.593 cw(c23.613,22.593) 24.058,22.593 24.058,21.063 ccw(c25.137,21.063) 26.217,21.063 26.217,22.593 cw(c26.661,22.593) 27.106,22.593 27.106,21.063 ccw(c28.185,21.063) 29.265,21.063 29.265,22.593 cw(c29.709,22.593) 30.154,22.593 30.154,21.063 ccw(c31.233,21.063) 32.313,21.063 32.313,22.593 cw(c32.757,22.593) 33.202,22.593 33.202,21.063 ccw(c34.281,21.063) 35.361,21.063 35.361,22.593 cw(c35.805,22.593) 36.25,22.593 36.25,21.063 ccw(c37.329,21.063) 38.409,21.063 38.409,22.593 cw(c38.853,22.593) 39.298,22.593 39.298,21.063 ccw(c40.377,21.063) 41.457,21.063 41.457,22.593 cw(c41.901,22.593) 42.346,22.593 42.346,21.063 ccw(c43.425,21.063) 44.505,21.063 44.505,21.238 cw(c44.949,21.238) 44.949,21.682 47.75,21.682 49.518,21.683 50.15,21.05 R6.1
Top_Layer_Diff_P: R3.2 R4.1 | length 100.9
  Top Layer w0.381: R3.2 5.11,22.74 5.11,22.541 5.333,22.317 6.341,22.317 8.373,22.317 cw(c8.373,21.238) 9.453,21.238 9.453,21.063 ccw(c9.897,21.063) 10.342,21.063 10.342,22.593 cw(c11.421,22.593) 12.501,22.593 12.501,21.063 ccw(c12.945,21.063) 13.39,21.063 13.39,22.593 cw(c14.469,22.593) 15.549,22.593 15.549,21.063 ccw(c15.993,21.063) 16.438,21.063 16.438,22.593 cw(c17.517,22.593) 18.597,22.593 18.597,21.063 ccw(c19.041,21.063) 19.486,21.063 19.486,22.593 cw(c20.565,22.593) 21.645,22.593 21.645,21.063 ccw(c22.089,21.063) 22.534,21.063 22.534,22.593 cw(c23.613,22.593) 24.693,22.593 24.693,21.063 ccw(c25.137,21.063) 25.582,21.063 25.582,22.593 cw(c26.661,22.593) 27.741,22.593 27.741,21.063 ccw(c28.185,21.063) 28.63,21.063 28.63,22.593 cw(c29.709,22.593) 30.789,22.593 30.789,21.063 ccw(c31.233,21.063) 31.678,21.063 31.678,22.593 cw(c32.757,22.593) 33.837,22.593 33.837,21.063 ccw(c34.281,21.063) 34.726,21.063 34.726,22.593 cw(c35.805,22.593) 36.885,22.593 36.885,21.063 ccw(c37.329,21.063) 37.774,21.063 37.774,22.593 cw(c38.853,22.593) 39.933,22.593 39.933,21.063 ccw(c40.377,21.063) 40.822,21.063 40.822,22.593 cw(c41.901,22.593) 42.981,22.593 42.981,21.063 ccw(c43.425,21.063) 43.87,21.063 43.87,21.238 cw(c44.949,21.238) 44.949,22.317 47.487,22.317 47.75,22.318 49.518,22.318 50.15,22.95 R4.1
Top_Layer_Single: R1.2 R2.1 | length 126.7
  Top Layer w0.254: R1.2 7,28 7.127,28 ccw(c7.127,28.381) 7.508,28.381 7.508,28.52 cw(c7.889,28.52) 8.27,28.52 8.27,27.412 ccw(c8.651,27.412) 9.032,27.412 9.032,28.52 cw(c9.413,28.52) 9.794,28.52 9.794,27.412 ccw(c10.175,27.412) 10.556,27.412 10.556,28.52 cw(c10.937,28.52) 11.318,28.52 11.318,27.412 ccw(c11.699,27.412) 12.08,27.412 12.08,28.52 cw(c12.461,28.52) 12.842,28.52 12.842,27.412 ccw(c13.223,27.412) 13.604,27.412 13.604,28.52 cw(c13.985,28.52) 14.366,28.52 14.366,27.412 ccw(c14.747,27.412) 15.128,27.412 15.128,28.52 cw(c15.509,28.52) 15.89,28.52 15.89,27.412 ccw(c16.271,27.412) 16.652,27.412 16.652,28.52 cw(c17.033,28.52) 17.414,28.52 17.414,27.412 ccw(c17.795,27.412) 18.176,27.412 18.176,28.52 cw(c18.557,28.52) 18.938,28.52 18.938,27.412 ccw(c19.319,27.412) 19.7,27.412 19.7,28.52 cw(c20.081,28.52) 20.462,28.52 20.462,27.412 ccw(c20.843,27.412) 21.224,27.412 21.224,28.52 cw(c21.605,28.52) 21.986,28.52 21.986,27.412 ccw(c22.367,27.412) 22.748,27.412 22.748,28.52 cw(c23.129,28.52) 23.51,28.52 23.51,27.412 ccw(c23.891,27.412) 24.272,27.412 24.272,28.52 cw(c24.653,28.52) 25.034,28.52 25.034,27.412 ccw(c25.415,27.412) 25.796,27.412 25.796,28.52 cw(c26.177,28.52) 26.558,28.52 26.558,27.412 ccw(c26.939,27.412) 27.32,27.412 27.32,28.52 cw(c27.701,28.52) 28.082,28.52 28.082,27.412 ccw(c28.463,27.412) 28.844,27.412 28.844,28.52 cw(c29.225,28.52) 29.606,28.52 29.606,27.412 ccw(c29.987,27.412) 30.368,27.412 30.368,28.52 cw(c30.749,28.52) 31.13,28.52 31.13,27.412 ccw(c31.511,27.412) 31.892,27.412 31.892,28.52 cw(c32.273,28.52) 32.654,28.52 32.654,27.412 ccw(c33.035,27.412) 33.416,27.412 33.416,28.52 cw(c33.797,28.52) 34.178,28.52 34.178,27.412 ccw(c34.559,27.412) 34.94,27.412 34.94,28.52 cw(c35.321,28.52) 35.702,28.52 35.702,27.412 ccw(c36.083,27.412) 36.464,27.412 36.464,28.52 cw(c36.845,28.52) 37.226,28.52 37.226,27.412 ccw(c37.607,27.412) 37.988,27.412 37.988,28.52 cw(c38.369,28.52) 38.75,28.52 38.75,27.412 ccw(c39.131,27.412) 39.512,27.412 39.512,28.52 cw(c39.893,28.52) 40.274,28.52 40.274,27.412 ccw(c40.655,27.412) 41.036,27.412 41.036,28.52 cw(c41.417,28.52) 41.798,28.52 41.798,27.412 ccw(c42.179,27.412) 42.56,27.412 42.56,28.52 cw(c42.941,28.52) 43.322,28.52 43.322,27.412 ccw(c43.703,27.412) 44.084,27.412 44.084,28.52 cw(c44.465,28.52) 44.846,28.52 44.846,27.412 ccw(c45.227,27.412) 45.608,27.412 45.608,28.52 cw(c45.989,28.52) 46.37,28.52 46.37,27.412 ccw(c46.751,27.412) 47.132,27.412 47.132,28.52 cw(c47.513,28.52) 47.894,28.52 47.894,28.381 ccw(c48.275,28.381) 48.275,28 49,28 R2.1
VCC: R1.1 R3.1 R5.1 R7.1 R9.1 R11.1 R13.1 R15.1 R17.1 R19.1 R21.1 R23.1 | length 44.8
  Top Layer w0.254: R1.1 R3.1 R5.1 R7.1 R9.1 R11.1 R13.1 R15.1 R17.1 R19.1 R21.1 R23.1 3.2,-15.05 3.2,-16.7 v1(3.25,-16.75)

## Polygon pours and split planes (outlines as drawn)
VCC on Bottom Layer "VCC_L06_P001" (solid, remove dead copper, pour order 1): 55,-20 55,32 0,32 0,-20
GND on Top Layer "GND_L01_P000" (solid, remove dead copper, pour order 0): 0,32 55,32 55,-20 0,-20
GND on Int1 (GND) (split plane): 54.49,-19.49 0.51,-19.49 0.51,31.49 54.49,31.49
VCC on Int4 (PWR) (split plane): 54.49,-19.49 0.51,-19.49 0.51,31.49 54.49,31.49

## Keep-outs
Keep-Out Layer:
  the board outline again, w0.2